# Altium PCB PCB1.PcbDoc
Units mm, origin at the board's own origin, x right, y up, seen from the top; angles counter-clockwise.
Board outline 122.72 x 80 mm, 2 copper layers (Top Layer, Bottom Layer); 41 components, 74 nets, 240 pads, 60 vias.
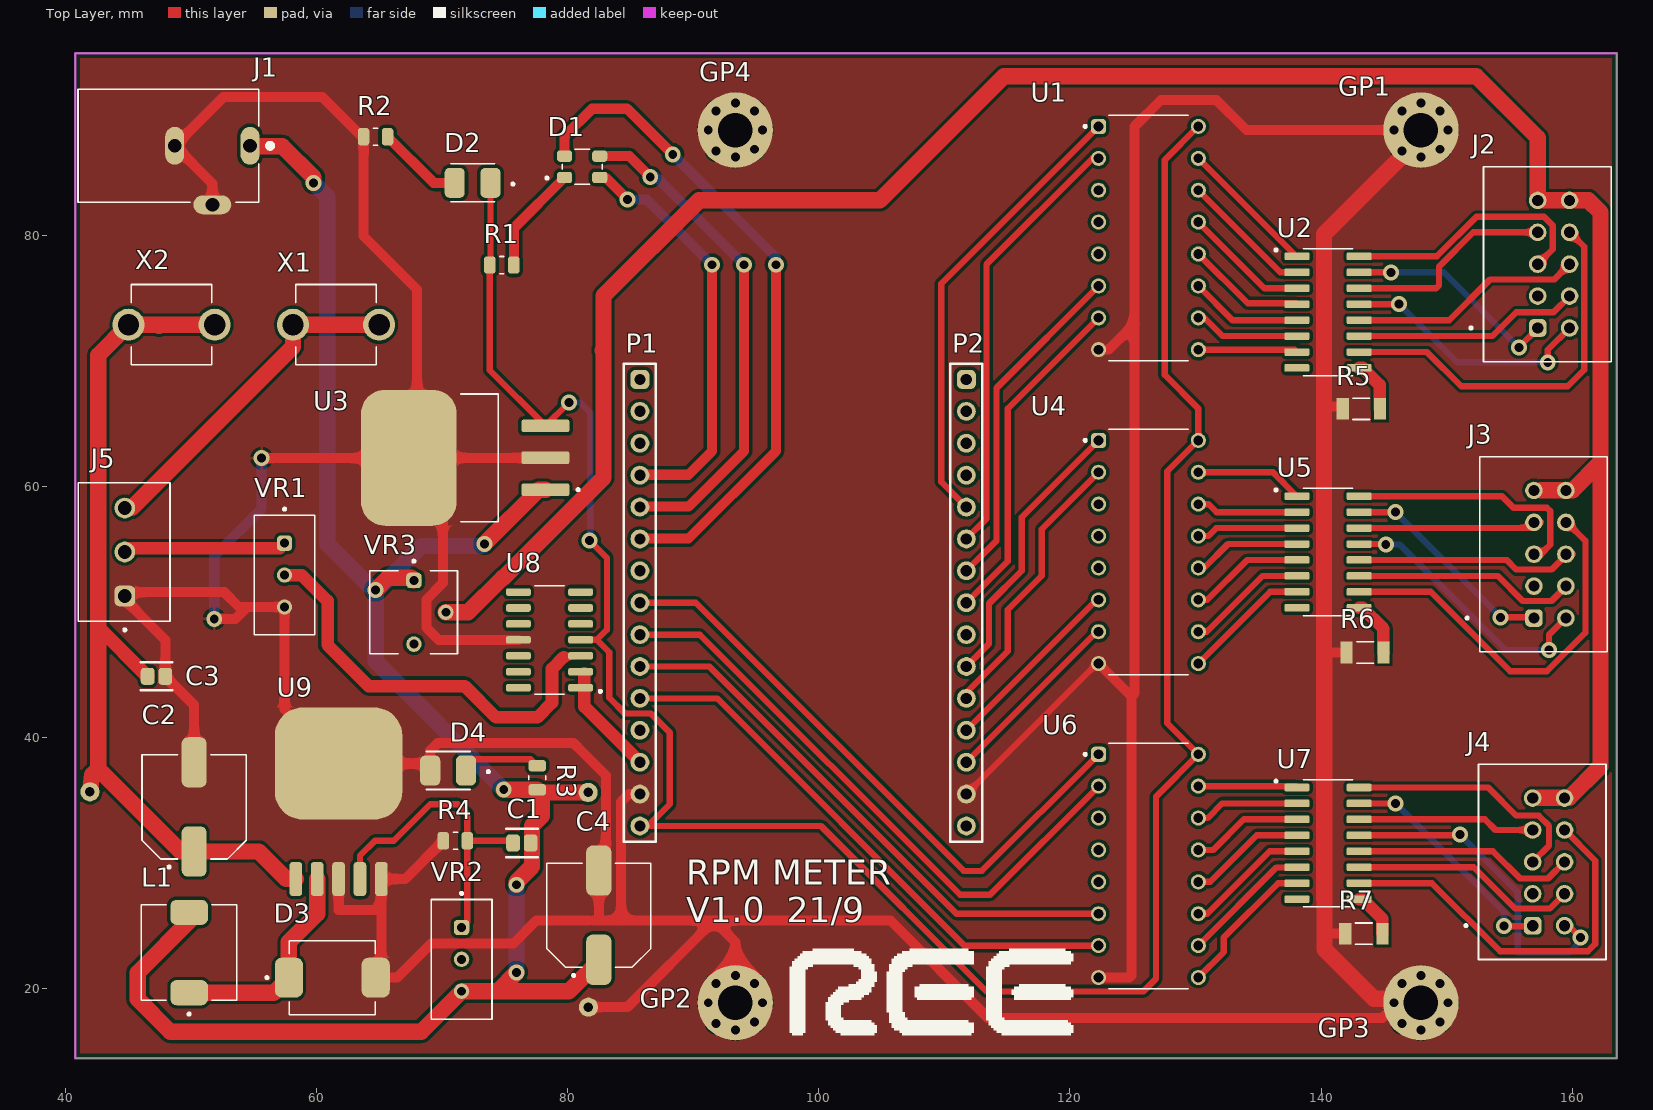
[diagram p0: Top Layer view]
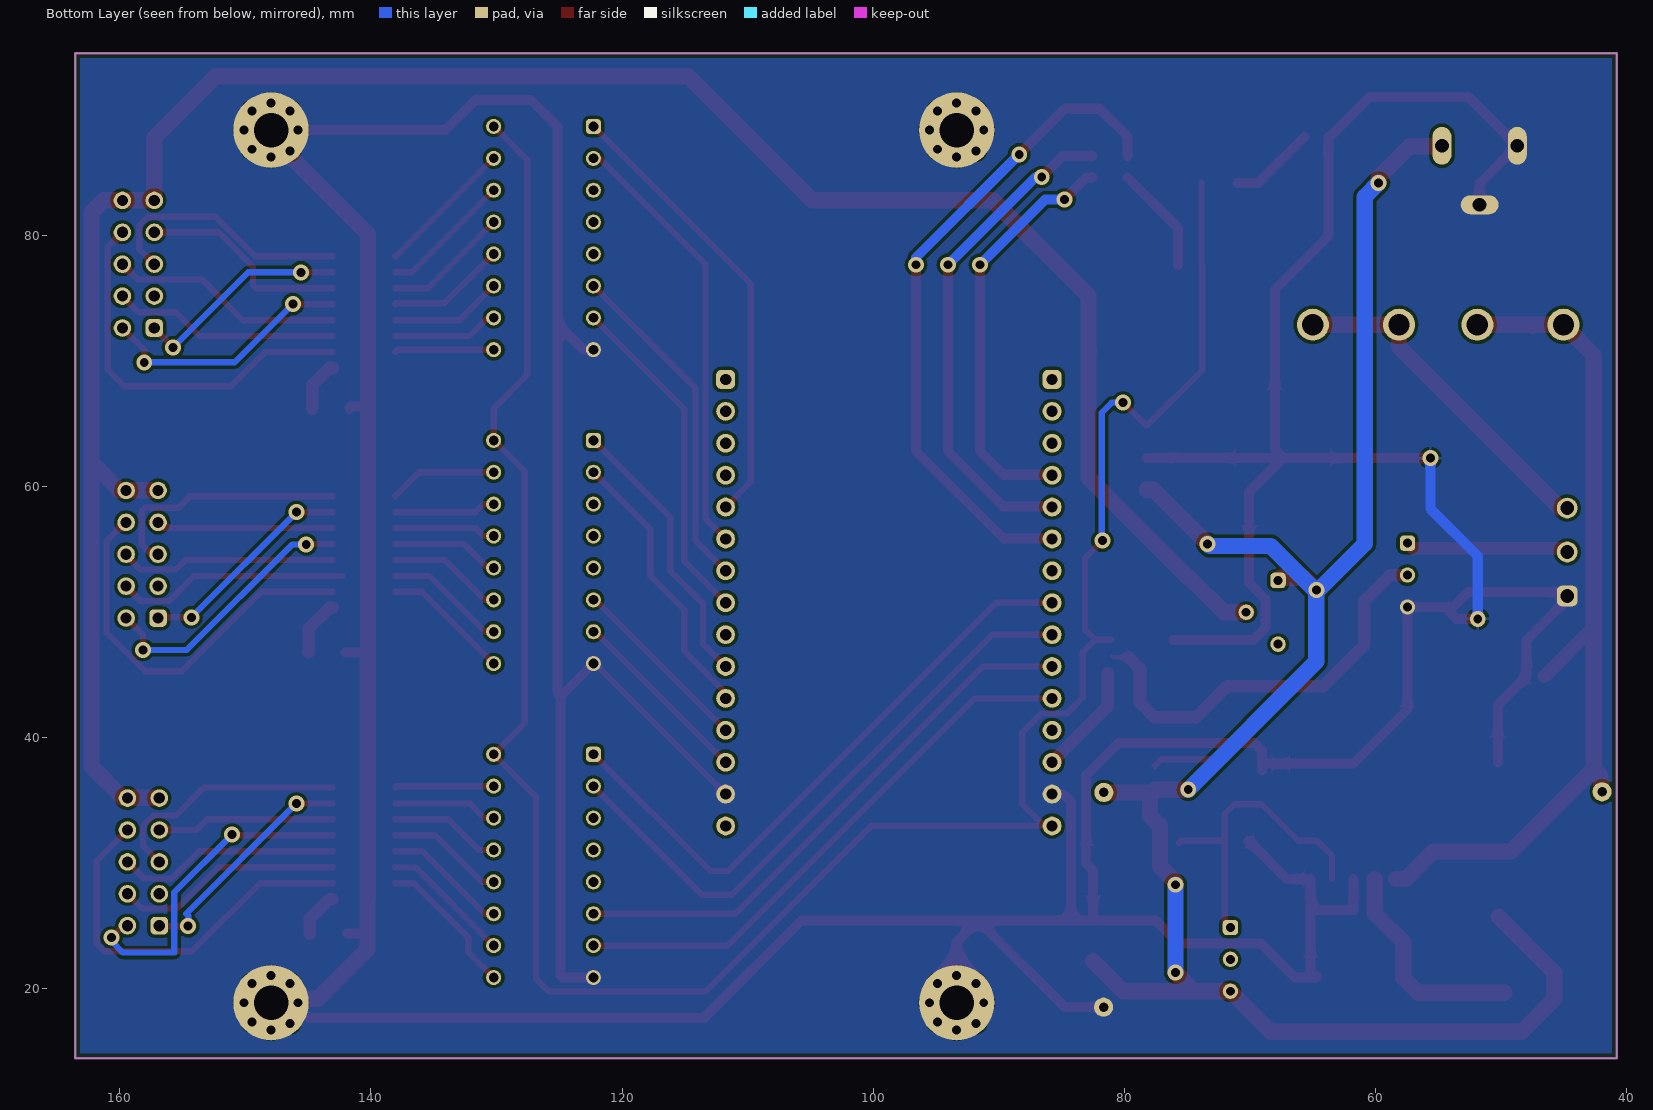
[diagram p1: Bottom Layer view, seen from below]

## Layer stack, top to bottom
Top Solder: solder mask 0.0102, Solder Resist, Dk 3.5
Top Layer: signal copper 0.0356
Dielectric 1: dielectric 0.32, FR-4, Dk 4.8
Bottom Layer: signal copper 0.0356
Bottom Solder: solder mask 0.0102, Solder Resist, Dk 3.5

## Board outline
40.8,14.5 108.25,14.5 163.525,14.5 163.525,94.5 108.35,94.5 40.8,94.5

## Design rules (kind name [scope] priority, off if disabled: settings)
Clearance "Schematic Clearance Constraint_3" [InNet('GND')] p1: gap=0.254 ignorepadtopadclearanceinfootprint=TRUE except(0: Arc-Hole Track-Hole SMDPad-Hole THPad-Hole Via-Hole Fill-Hole Poly-Hole Region-Hole Text-Hole)
Clearance "Schematic Clearance Constraint_2" [InNet('12v')] p2: gap=0.254 ignorepadtopadclearanceinfootprint=TRUE except(0: Arc-Hole Track-Hole SMDPad-Hole THPad-Hole Via-Hole Fill-Hole Poly-Hole Region-Hole Text-Hole)
Clearance "Schematic Clearance Constraint_1" [InNet('NetP1_13')] p3: gap=0.4 ignorepadtopadclearanceinfootprint=TRUE
Clearance "Schematic Clearance Constraint" [InNet('NetU8_3')] p4: gap=0.3 ignorepadtopadclearanceinfootprint=TRUE
Clearance "Main Clearance" [All] p5: gap=0.2 ignorepadtopadclearanceinfootprint=TRUE
PolygonConnect PolygonConnect_4 [All vs IsNamedPolygon('Top Layer-No Net')] p1: thpad.connectstyle=Direct thpad.reliefconductorwidth=0.254 thpad.reliefentries=4 thpad.polygonreliefangle="90 Angle" thpad.airgapwidth=0.254 smdpad.connectstyle=Direct smdpad.reliefconductorwidth=0.254 smdpad.reliefentries=4 smdpad.polygonreliefangle="90 Angle" smdpad.airgapwidth=0.254 via.connectstyle=Relief via.reliefconductorwidth=0.254 via.reliefentries=4 via.polygonreliefangle="90 Angle" via.airgapwidth=0.254
PolygonConnect PolygonConnect_3 [All vs IsNamedPolygon('Top Layer-No Net')] p2: thpad.connectstyle=Direct thpad.reliefconductorwidth=0.254 thpad.reliefentries=4 thpad.polygonreliefangle="90 Angle" thpad.airgapwidth=0.254 smdpad.connectstyle=Direct smdpad.reliefconductorwidth=0.254 smdpad.reliefentries=4 smdpad.polygonreliefangle="90 Angle" smdpad.airgapwidth=0.254 via.connectstyle=Relief via.reliefconductorwidth=0.254 via.reliefentries=4 via.polygonreliefangle="90 Angle" via.airgapwidth=0.254
PolygonConnect PolygonConnect_2 [All vs IsNamedPolygon('Top Layer-No Net')] p3: thpad.connectstyle=Direct thpad.reliefconductorwidth=0.254 thpad.reliefentries=4 thpad.polygonreliefangle="90 Angle" thpad.airgapwidth=0.254 smdpad.connectstyle=Direct smdpad.reliefconductorwidth=0.254 smdpad.reliefentries=4 smdpad.polygonreliefangle="90 Angle" smdpad.airgapwidth=0.254 via.connectstyle=Relief via.reliefconductorwidth=0.254 via.reliefentries=4 via.polygonreliefangle="90 Angle" via.airgapwidth=0.254
PolygonConnect PolygonConnect_1 [All vs IsNamedPolygon('Top Layer-No Net')] p4: thpad.connectstyle=Direct thpad.reliefconductorwidth=0.254 thpad.reliefentries=4 thpad.polygonreliefangle="90 Angle" thpad.airgapwidth=0.254 smdpad.connectstyle=Direct smdpad.reliefconductorwidth=0.254 smdpad.reliefentries=4 smdpad.polygonreliefangle="90 Angle" smdpad.airgapwidth=0.254 via.connectstyle=Relief via.reliefconductorwidth=0.254 via.reliefentries=4 via.polygonreliefangle="90 Angle" via.airgapwidth=0.254
PolygonConnect [All] p5: connectstyle=Relief reliefconductorwidth=0.254 reliefentries=4 polygonreliefangle="90 Angle" airgapwidth=0.254
RoutingVias [All] p1: holewidth=0.711 width=1.27 viastyle="Through Hole" minholewidth=0.3 minwidth=0.8 maxholewidth=0.711 maxwidth=1.27
SolderMaskExpansion [All] p1: expansion=0.102 istentingtop=FALSE
UnRoutedNet [All] p1: checkbadconnections=TRUE
Width "Schematic Width Constraint_7" [InNet('NetR5_1')] p1: maxlimit=1.5 minlimit=1 preferedwidth=1.3
Width "Schematic Width Constraint_6" [InNet('NetR7_1')] p2: maxlimit=1.5 minlimit=1 preferedwidth=1.3
Width "Schematic Width Constraint_5" [InNet('NetR6_1')] p3: maxlimit=1.5 minlimit=1 preferedwidth=1.3
Width "Schematic Width Constraint_13" [InNet('NetP1_13')] p4: maxlimit=1.5 minlimit=0.254 preferedwidth=1
Width "Schematic Width Constraint_12" [InNet('NetU8_3')] p5: maxlimit=1.5 minlimit=0.254 preferedwidth=1
Width "Schematic Width Constraint_4" [InNet('12v')] p6: maxlimit=1.5 minlimit=1 preferedwidth=1.3
Width "Schematic Width Constraint_3" [InNet('NetD3_C')] p7: maxlimit=1.5 minlimit=1 preferedwidth=1.3
Width "Schematic Width Constraint_2" [InNet('NetJ5_3')] p8: maxlimit=1.5 minlimit=1 preferedwidth=1.3
Width "Schematic Width Constraint_1" [InNet('NetJ2_5')] p9: maxlimit=1.5 minlimit=1 preferedwidth=1.3
Width "Schematic Width Constraint_11" [InNet('NetJ5_2')] p10: maxlimit=1.5 minlimit=0.254 preferedwidth=1
Width Width_1 [InNet('GND')] p11: maxlimit=2 minlimit=0.254 preferedwidth=0.8
Width "Schematic Width Constraint" [InNet('NetC2_1')] p12: maxlimit=1.5 minlimit=1 preferedwidth=1.3
Width [All] p13: maxlimit=2 minlimit=0.2 preferedwidth=0.5
29 further rules are at their usual default settings.

## Components (designator, comment, footprint, x,y, rotation, side; value= is the part's Value field where it differs from the comment)
C1 "C0805C104K5RAC" KEMET_C0805C-DN_IPC_C 76.351,31.625 r180 top
C2 "EEEFK1V221P" CAP_EEEFK1V221P 50.25,34.5 r90 top
C3 "C0805C104K5RAC" KEMET_C0805C-DN_IPC_C 47.25,44.9 r0 top
C4 "EEEFK1V221P" CAP_EEEFK1V221P 82.475,25.875 r90 top
D1 "LL-R3528RGBC-008-B" LED_LL-R3528RGBC-008-B 81.15,85.475 r0 top
D2 "OF-SMD3528WC" LED_OF-SMD3528WC 72.425,84.2 r180 top
D3 "SS34" DIOM7959X265N 61.25,20.9 r0 top
D4 "OF-SMD3528WC" LED_OF-SMD3528WC 70.475,37.4 r180 top
GP1 "Grounded Pad" "2.75mm Grounded Pad" 147.95,88.4 r0 top
GP2 "Grounded Pad" "2.75mm Grounded Pad" 93.35,18.9 r0 top
GP3 "Grounded Pad" "2.75mm Grounded Pad" 147.95,18.9 r0 top
GP4 "Grounded Pad" "2.75mm Grounded Pad" 93.35,88.4 r0 top
J1 "PJ-102A" CUI_PJ-102A 48.2,87.15 r180 top
J2 "102618-3" TE_102618-3 158.52,77.72 r90 top
J3 "102618-3" TE_102618-3 158.22,54.62 r90 top
J4 "102618-3" TE_102618-3 158.12,30.12 r90 top
J5 "1751251" PHOENIX_1751251 44.725,54.8 r90 top
L1 "B1047AS-471M=P3" IND_B1047AS-471M=P3 49.85,22.9 r90 top
P1 "Header 15" HDR1X15 85.75,68.54 r270 top
P2 "Header 15" HDR1X15 111.75,68.54 r270 top
R1 "RC0805JR-073K3L" RESC2012X60N 74.75,77.65 r0 top
R2 "RC0805JR-073K3L" RESC2012X60N 64.695,87.875 r0 top
R3 "RC0805JR-073K3L" RESC2012X60N 77.575,36.825 r270 top
R4 "RC0805JR-073K3L" RESC2012X60N 71.05,31.8 r0 top
R5 "RC1206JR-0713RL" RESC3116X65N 143.2,66.2 r180 top
R6 "RC1206JR-0713RL" RESC3116X65N 143.5,46.8 r180 top
R7 "RC1206JR-0713RL" RESC3116X65N 143.4,24.4 r180 top
U1 "CD4511BE" DIP794W45P254L1969H508Q16 126.25,79.8 r0 top
U2 "ULN2003AID" SOIC127P600X175-16N 140.55,73.9 r0 top
U3 "LM7805S/NOPB" TO254P1524X483-4N 71.83,62.3 r180 top
U4 "CD4511BE" DIP794W45P254L1969H508Q16 126.25,54.8 r0 top
U5 "ULN2003AID" SOIC127P600X175-16N 140.55,54.8 r0 top
U6 "CD4511BE" DIP794W45P254L1969H508Q16 126.25,29.8 r0 top
U7 "ULN2003AID" SOIC127P600X175-16N 140.55,31.6 r0 top
U8 "LM324DR" SOIC127P600X175-14N 78.55,47.8 r180 top
U9 "LM2596S-12" TO170P1435X465-6N 61.75,37.8 r0 top
VR1 "3296W-1-254LF" TRIM_3296W-1-254LF 57.45,52.96 r270 top
VR2 "3296W-1-254LF" TRIM_3296W-1-254LF 71.55,22.36 r270 top
VR3 "3362P-1-253LF" TRIM_3362P-1-253LF 67.75,50 r270 top
X1 "BK-6005" FUSE_BK-6005 61.55,72.9 r180 top
X2 "BK-6005" FUSE_BK-6005 48.45,72.9 r180 top

## Footprints (in the part's own frame and the unit in brackets; to place one, negate y for a bottom-side part, rotate by r counter-clockwise, add the part's x,y. Pads: shape width x height; smd on the part's side, far side on the other; paste and mask are expansions set on the pad)
"2.75mm Grounded Pad" [mm]
  round 6 hole 2.75: 1(0,0)
  body extent -3.1,-3.1 3.1,3.1, height 1.27
CAP_EEEFK1V221P [mm]
  rrect50% 4x2 smd: 1(-3.55,0) 2(3.55,0)
  silkscreen extent -4.9,-4.15 4.15,4.15, body extent -5.82,-4.42 5.83,4.43, height 1.27
CUI_PJ-102A [mm]
  oval 1.508x3.016 hole 1.1: 1(-6.5,0) 2(-0.5,0)
  oval 3.016x1.508 hole 1.1: 3(-3.5,4.7)
  silkscreen extent -8.3,-4.5 7.2,4.5, body extent -8.5,-4.77 7.53,5.83, height 1.27
DIOM7959X265N [mm]
  rrect50% 2.25x3.18 smd: A(3.455,0) C(-3.455,0)
  silkscreen extent -5.3,-2.95 3.44,2.95, body extent -5.4,-3.22 4.86,3.23, height 1.27
DIP794W45P254L1969H508Q16 [mm]
  rrect50% 1.2x1.2 hole 0.78: 1(-3.97,8.89)
  round 1.2 hole 0.78: 2(-3.97,6.35) 3(-3.97,3.81) 4(-3.97,1.27) 5(-3.97,-1.27) 6(-3.97,-3.81) 7(-3.97,-6.35) 8(-3.97,-8.89) 9(3.97,-8.89) 10(3.97,-6.35) 11(3.97,-3.81) 12(3.97,-1.27) 13(3.97,1.27) 14(3.97,3.81) 15(3.97,6.35) 16(3.97,8.89)
  silkscreen extent -5.13,-9.77 3.17,9.77, body extent -5.23,-10.12 4.81,10.12, height 1.27
FUSE_BK-6005 [mm]
  round 2.55 hole 1.7: 1(-3.43,0) 2(3.43,0)
  silkscreen extent -3.2,-3.2 3.2,3.2, body extent -4.98,-3.47 4.98,3.48, height 1.27
HDR1X15 [mm] "Connector; Header; 15 Position"
  rrect50% 1.5x1.5 hole 0.9: 1(0,0)
  round 1.5 hole 0.9: 2(2.54,0) 3(5.08,0) 4(7.62,0) 5(10.16,0) 6(12.7,0) 7(15.24,0) 8(17.78,0) 9(20.32,0) 10(22.86,0) 11(25.4,0) 12(27.94,0) 13(30.48,0) 14(33.02,0) 15(35.56,0)
  silkscreen extent -1.27,-1.27 36.83,1.27, body extent -1.37,-1.37 36.93,1.37, height 1.27
IND_B1047AS-471M=P3 [mm]
  rrect50% 2x3 smd: 1(-3.2,0) 2(3.2,0)
  silkscreen extent -5,-3.8 3.8,3.8, body extent -5.1,-4.07 4.48,4.08, height 1.27
KEMET_C0805C-DN_IPC_C [mm]
  rrect50% 1.105x1.356 smd paste+0 mask+0: 1(-0.701,0) 2(0.701,0)
  silkscreen extent -1.25,-1.12 1.25,1.12, body extent -1.45,-1.22 1.45,1.22, height 1.27
LED_LL-R3528RGBC-008-B [mm]
  rrect50% 1.2x0.9 smd: 1(-1.4,-0.85) 2(1.4,-0.85) 3(1.4,0.85) 4(-1.4,0.85)
  silkscreen extent -2.9,-1.4 1.6,1.4, body extent -3,-1.67 2.27,1.68, height 1.27
LED_OF-SMD3528WC [mm]
  rrect50% 1.6x2.4 smd: 1(-1.425,0) 2(1.425,0)
  silkscreen extent -3.3,-1.51 1.75,1.51, body extent -3.4,-1.67 2.5,1.68, height 1.27
PHOENIX_1751251 [mm]
  rrect50% 1.65x1.65 hole 1.1: 1(-3.5,0)
  round 1.65 hole 1.1: 2(0,0) 3(3.5,0)
  silkscreen extent -6.3,-3.6 5.5,3.7, body extent -6.4,-3.87 5.78,3.98, height 1.27
RESC2012X60N [mm]
  rrect50% 0.92x1.38 smd: 1(-0.955,0) 2(0.955,0)
  silkscreen extent -0.17,-0.68 0.17,0.68, body extent -1.69,-0.96 1.69,0.97, height 1.27
RESC3116X65N [mm]
  rect 0.97x1.73 smd: 1(-1.48,0) 2(1.48,0)
  silkscreen extent -0.67,-0.85 0.67,0.85
SOIC127P600X175-14N [mm]
  rrect50% 1.97x0.6 smd: 1(-2.475,3.81) 2(-2.475,2.54) 3(-2.475,1.27) 4(-2.475,0) 5(-2.475,-1.27) 6(-2.475,-2.54) 7(-2.475,-3.81) 8(2.475,-3.81) 9(2.475,-2.54) 10(2.475,-1.27) 11(2.475,0) 12(2.475,1.27) 13(2.475,2.54) 14(2.475,3.81)
  silkscreen extent -4.15,-4.33 1.17,4.33, body extent -4.25,-4.6 3.74,4.6, height 1.27
SOIC127P600X175-16N [mm]
  rrect25% 1.97x0.6 smd: 1(-2.475,4.445) 2(-2.475,3.175) 3(-2.475,1.905) 4(-2.475,0.635) 5(-2.475,-0.635) 6(-2.475,-1.905) 7(-2.475,-3.175) 8(-2.475,-4.445) 9(2.475,-4.445) 10(2.475,-3.175) 11(2.475,-1.905) 12(2.475,-0.635) 13(2.475,0.635) 14(2.475,1.905) 15(2.475,3.175) 16(2.475,4.445)
  silkscreen extent -4.24,-5.06 1.95,5.06, body extent -4.35,-5.22 3.74,5.23, height 1.27
TE_102618-3 [mm]
  rrect50% 1.398x1.398 hole 0.89: 1(-5.08,1.27)
  round 1.398 hole 0.89: 2(-2.54,1.27) 3(0,1.27) 4(2.54,1.27) 5(5.08,1.27) 6(-5.08,-1.27) 7(-2.54,-1.27) 8(0,-1.27) 9(2.54,-1.27) 10(5.08,-1.27)
  silkscreen extent -7.77,-4.57 7.77,6.69, body extent -8.05,-4.85 8.05,6.79, height 1.27
TO170P1435X465-6N [mil]
  rrect50% 40x106 smd: 1(-134,-356) 2(-67,-356) 3(0,-356) 4(67,-356) 5(134,-356)
  rrect50% 400x352 smd: 6(0,6)
  body extent -204,-413 204,186, height 50
TO254P1524X483-4N [mm]
  rrect25% 3.79x0.99 smd: 1(-6.4,2.54) 2(-6.4,0) 3(-6.4,-2.54)
  rrect50% 7.62x10.84 smd paste-6: 4(4.48,0)
  silkscreen extent -9.1,-5.08 0.35,5.08, body extent -9.2,-5.69 8.57,5.7, height 1.27
TRIM_3296W-1-254LF [mm]
  rrect50% 1.218x1.218 hole 0.71: 1(-2.54,0)
  round 1.218 hole 0.71: 2(0,0) 3(2.54,0)
  silkscreen extent -5.35,-2.41 4.76,2.42, body extent -5.45,-2.68 5.04,2.7, height 1.27
TRIM_3362P-1-253LF [mm]
  rrect50% 1.222x1.222 hole 0.714: 1(-2.54,0)
  round 1.222 hole 0.714: 2(0,2.54) 3(2.54,0)
  silkscreen extent -4.16,-3.53 3.3,3.47, body extent -4.26,-3.8 3.58,3.75, height 1.27

## Part data
C2 C4: "220ÂµF 35V Aluminum Electrolytic Capacitors Radial, Can - SMD 2000 Hrs @ 105Â°C", Package="RADIAL-2 Panasonic", Availability="In Stock", Check_prices=https://www.snapeda.com/parts/EEEFK1V221P/Panasonic/view-part/2501925/?ref=eda, MF=Panasonic, MP=EEEFK1V221P, Price=None, SnapEDA_Link=https://www.snapeda.com/parts/EEEFK1V221P/Panasonic/view-part/2501925/?ref=snap
D1: "LED; SMD; 3528, PLCC2; RGB; 3.5x2.8mm; 120Â°; Red lumin: 1", Package="PLCC-2 Lucky Light", Availability=Unavailable, MF="Lucky Light", MP=LL-R3528RGBC-008-B, Price=None, SnapEDA_Link=https://www.snapeda.com/parts/LL-R3528RGBC-008-B/Lucky%20Light/view-part/47649/?ref=snap
D2 D4: "LED; SMD; 3528, PLCC2; white cold; 1700-2500mcd; 120Â°; 2", Package="PLCC-2 Optoflash", Availability=Unavailable, Check_prices=https://www.snapeda.com/parts/OF-SMD3528WC/Optoflash/view-part/702333/?ref=eda, MF=Optoflash, MP=OF-SMD3528WC, Price=None, SnapEDA_Link=https://www.snapeda.com/parts/OF-SMD3528WC/Optoflash/view-part/702333/?ref=snap
D3: "Diode Schottky 40V 3A Surface Mount SMC _DO-214AB_", Package="DO-214AB-214 ON Semiconductor", Availability=Unavailable, MF="ON Semiconductor", MP=SS34, Price=None, SnapEDA_Link=https://www.snapeda.com/parts/SS34/ON%20Semiconductor/view-part/4631325/?ref=snap
GP1 GP2 GP3 GP4: library part "2.75mm Grounded Pad", "2.75mm Diameter Grounded Pad"
J1: "2.0 x 6.5 mm, 2.5 A, Horizontal, Through Hole, Tapered Pins, Dc Power Jack Connector", Package=None, Availability=Unavailable, CUI_purchase_URL=https://www.cuidevices.com/product/interconnect/connectors/dc-power-connectors/jacks/pj-102a?utm_source=snapeda.com&utm_medium=referral&utm_campaign=snapedaBOM, MF="CUI Devices", MP=PJ-102A, Price=None, SnapEDA_Link=https://www.snapeda.com/parts/PJ-102A/CUI%20Devices/view-part/55545/?ref=snap
J2 J3 J4: "10 MODII HDR DRST SHRD .100CL", Package=None, Availability=Unavailable, MP=102618-3, Price=None
J5: "3 Position Wire to Board Terminal Block Horizontal with Board 0.138 _3.50mm_ Through Hole", Package=None, Availability=Unavailable, MF="Phoenix Contact", MP=1751251, Price=None, SnapEDA_Link=https://www.snapeda.com/parts/1751251/Phoenix%20Contact/view-part/553210/?ref=snap
L1: "Inductor Power Shielded Wirewound 220uH 20% 100KHz Ferrite 470mA 1.1Ohm DCR 2929 T/R", Package=None, Availability=Unavailable, MP=B1047AS-471M=P3, Price=None
P1 P2: "Header, 15-Pin", LatestRevisionDate=17-Jul-2002, LatestRevisionNote="Re-released for DXP Platform.", Publisher="Altium Limited"
R1 R2 R3 R4: "RC Series 0805 0.125 W 3.3 kOhms 5% Â±100 ppm/Â°C SMT Thick Film Chip Resistor", Package=None, Availability=Unavailable, MP=RC0805JR-073K3L, Price=None
R5 R6 R7: "13 Ohms Â±5% 0.25W, 1/4W Chip Resistor 1206 _3216 Metric_ Moisture Resistant Thick Film", Package="3116 Yageo", Availability=Unavailable, MF=Yageo, MP=RC1206JR-0713RL, Price=None, SnapEDA_Link=https://www.snapeda.com/parts/RC1206JR-0713RL/Yageo/view-part/105893/?ref=snap
U1 U4 U6: "CMOS BCD-to-7-Segment LED Latch Decoder Drivers 16-PDIP -55 to 125", Package="PDIP-16 Texas Instruments", Availability=Good, Check_prices=https://www.snapeda.com/parts/CD4511BE/Texas%20Instruments/view-part/586644/?ref=eda, MF="Texas Instruments", MP=CD4511BE, Price=None, Purchase-URL=https://pricing.snapeda.com/search/part/CD4511BE/?ref=eda, SnapEDA_Link=https://www.snapeda.com/parts/CD4511BE/Texas%20Instruments/view-part/586644/?ref=snap
U2 U5 U7: "50-V, 7-ch darlington transistor array, -40 to 105C 16-SOIC -40 to 105", Package="SOIC-16 Texas Instruments", Check_prices=https://www.snapeda.com/parts/ULN2003AID/Texas%20Instruments/view-part/1101113/?ref=eda, Digi-Key_Part_Number=296-15407-2-ND, MF="Texas Instruments", MP=ULN2003AID, Purchase-URL=https://pricing.snapeda.com/search/part/ULN2003AID/?ref=eda, SnapEDA_Link=https://www.snapeda.com/parts/ULN2003AID/Texas%20Instruments/view-part/1101113/?ref=snap
U3: "1.5-A, 30-V, linear voltage regulator 3-DDPAK/TO-263 0 to 125", Package="TO-263-3 Texas Instruments", Availability=Warning, DigiKey-Purchase-URL=https://snapeda.com/shop?store=DigiKey&id=546227, MF="Texas Instruments", MP=LM7805S/NOPB, Price=None, SnapEDA_Link=https://www.snapeda.com/parts/LM7805S/NOPB/Texas%20Instruments/view-part/546227/?ref=snap, Texas_Instruments-Purchase-URL=https://snapeda.com/shop?store=Texas+Instruments&id=546227
U8: "4-Channel industry standard operational amplifier 14-SOIC 0 to 70", Package="SOIC-14 Texas Instruments", Arrow_Electronics-Purchase-URL=https://snapeda.com/shop?store=Arrow+Electronics&id=1818, Availability=Good, DigiKey-Purchase-URL=https://snapeda.com/shop?store=DigiKey&id=1818, MF="Texas Instruments", Mouser-Purchase-URL=https://snapeda.com/shop?store=Mouser&id=1818, MP=LM324DR, Price=None, SnapEDA_Link=https://www.snapeda.com/parts/LM324DR/Texas%20Instruments/view-part/1818/?ref=snap, Texas_Instruments-Purchase-URL=https://snapeda.com/shop?store=Texas+Instruments&id=1818
U9: "Buck Switching Regulator IC Positive Fixed 12V 1 Output 3A TO-263-6, DÂ²Pak _5 Leads + Tab_, TO-263BA", Package="TO-263-5 Texas Instruments", Availability=Unavailable, MF="Texas Instruments", MP=LM2596S-12, Price=None, SnapEDA_Link=https://www.snapeda.com/parts/LM2596S-12/Texas%20Instruments/view-part/558935/?ref=snap
VR1 VR2: "250 kOhms 0.5W, 1/2W PC Pins Through Hole Trimmer Potentiometer Cermet 25 Turn Top Adjustment", Package="SOT-23-5 Bourns", Availability=Warning, Check_prices=https://www.snapeda.com/parts/3296W-1-254LF/Bourns%20-%20J.W.%20Miller/view-part/231802/?ref=eda, MF=Bourns, MP=3296W-1-254LF, Price=None, Purchase-URL=https://pricing.snapeda.com/search/part/3296W-1-254LF/?ref=eda, SnapEDA_Link=https://www.snapeda.com/parts/3296W-1-254LF/Bourns%20-%20J.W.%20Miller/view-part/231802/?ref=snap
VR3: "25 kOhms 0.5W, 1/2W PC Pins Through Hole Trimmer Potentiometer Cermet 1 Turn Top Adjustment", Package="3116 Bourns", Availability=Good, Check_prices=https://www.snapeda.com/parts/3362P-1-253LF/Bourns/view-part/493663/?ref=eda, MF=Bourns, MP=3362P-1-253LF, Price=None, Purchase-URL=https://pricing.snapeda.com/search/part/3362P-1-253LF/?ref=eda, SnapEDA_Link=https://www.snapeda.com/parts/3362P-1-253LF/Bourns/view-part/493663/?ref=snap
X1 X2: "Fuse Clip 1 Circuit Cartridge Through Hole", Package="Non-Standard MPD", Availability=Unavailable, MF=MPD, MP=BK-6005, Price=None, SnapEDA_Link=https://www.snapeda.com/parts/BK-6005/MPD/view-part/4614389/?ref=snap

## Free pads (board coordinates)
  round 1.524 hole 0.762: 7(81.65,18.55) 8(81.625,35.65) 9(41.95,35.7)

## Via types
v1: diameter 1.27, hole 0.711, Top Layer to Bottom Layer, 60 vias

## Nets (pads, with @x,y where several pads share a name; then routed paths per layer and width w, separated by ;. In a path a pad name is that pad's centre, name@x,y a point inside that pad or via, vN(x,y) a via of type N, cw(c..) or ccw(c..) an arc to the next point about the centre after c; other vN are vias at no path point)
12v: C1.1 C4.1 J1.1 L1.2 pad.8 R3.2 U3.1 VR2.3 VR3.1 | length 154.4
  Top Layer w1.3: L1.2@50.2,25.75 45.75,21.3 45.75,19.2 48.35,16.6 68.33,16.6 VR2.3 74.43,19.82 ; J1.1 54.725,87.125 57.275,87.125 59.75,84.65 v1(59.75,84.2) ; v1(64.7,51.775) 65.675,52.75 67.54,52.75 VR3.1 ; v1(73.375,55.45) 77.685,59.76 U3.1 ; v1(74.905,35.87) R3.2 R3.2@77.795,35.65 ; v1(75.925,21.315) 74.43,19.82 ; v1(75.925,28.3) 75.925,28.525 77.152,29.752 77.152,33.002 77.95,33.8 77.95,35.495 R3.2@77.795,35.65 ; pad.8 R3.2@77.795,35.65 ; C4.1@82.475,22.2 80.095,19.82 74.43,19.82
  Bottom Layer w1.3: v1(59.75,84.2) 60.85,83.1 60.85,55.45 64.675,51.625 v1@64.7,51.65 ; v1(64.7,51.775) v1@64.7,51.65 ; v1(73.375,55.45) 73.2,55.275 68.325,55.275 v1@64.7,51.65 ; v1(74.905,35.87) 64.7,46.075 v1@64.7,51.65 ; v1(75.925,21.315) v1(75.925,28.3)
GND: C2.2 C3.2 C4.2 D3.A D4.2 GP1.1 GP2.1 GP3.1 GP4.1 J1.2 J1.3 J5.1 P1.14 P2.14 pad.7 R2.1 R4.1 R5.2 R6.2 R7.2 U1.8 U3.2 U3.4 U4.8 U6.8 U8.11 U9.3 U9.5 U9.6 VR1.3 | length 534.6
  Top Layer w0.5: P2.14 122.14,45.91 U4.8
  Top Layer w0.8: C2.2 50.25,42.601 C3.2 47.951,47.799 44.725,51.025 J5.1 44.725,51.6 52.65,51.6 53.83,50.42 54.495,50.42 ; J1.3 51.7,84.15 J1.2 52.575,91.025 60.47,91.025 R2.1@63.72,87.775 ; v1(51.85,49.475) 53.55,49.475 54.495,50.42 ; v1(55.625,62.275) 67.325,62.275 U3.4 ; U9.3 61.75,26.3 64.65,26.3 65.154,26.804 ; R2.1 63.74,79.96 68,75.7 68,62.95 U3.4 ; D4.2 D4.2@69.05,38.275 ; R4.1 67.053,28.758 U9.5 65.154,26.804 ; U8.11 69.725,47.8 68.75,48.775 68.75,51.025 70.05,52.325 70.05,59.6 U3.4 ; U3.2 U3.4 ; pad.7 84.75,18.55 91.65,25.45 ; 81.7,25.45 77.5,25.45 75.675,23.625 69.125,23.625 66.4,20.9 D3.A 64.705,21.029 64.834,21.029 65.154,21.349 65.154,26.804 ; 82.05,25.45 82.6,25.45 ; P1.14 84.87,35.52 84.25,34.9 84.25,25.45 ; GP2.1 v1(93.35,21.059) 93.35,23.75 91.65,25.45 ; U6.8 124.74,20.91 124.89,21.06 124.89,43.3 ; U4.8 124.89,43.3 ; U1.8 123.06,70.91 125.15,73 ; 140.225,66.4 141.635,66.4 141.72,66.315 R5.2 ; 140.275,24.6 140.475,24.4 R7.2 ; 140.345,46.8 R6.2 ; GP3.1@145.548,19.231 145.791,18.988 v1(145.791,18.9) GP3.1 GP3.1@146.15,17.1 ; GP1.1@145.791,88.7 GP1.1@146.35,88.7 ; v1(146.426,17.249) 145.77,17.905 145.086,17.905 144.881,17.7 113.45,17.7 105.7,25.45 91.65,25.45 ; GP1.1@146.515,86.406 146.515,87.676 v1(145.791,88.4) 134.05,88.4 131.65,90.8 127.25,90.8 125.15,88.7 125.15,73 ; GP3.1@147.95,19.5 GP3.1@148.95,19.5 ; 54.495,50.42 VR1.3 57.45,42.252 U9.6 68.727,37.952 D4.2@69.05,38.275 ; D4.2@69.05,38.275 69.05,38.975 69.65,39.575 80.475,39.575 81.175,38.875 83.041,37.009 83.041,29.991 C4.2 82.475,25.575 82.6,25.45 ; 82.6,25.45 84.25,25.45 ; 84.25,25.45 91.65,25.45 ; 124.89,43.3 125.15,43.56 125.15,73
  Top Layer w1.3: 140.345,46.8 140.245,46.9 ; GP3.1@145.548,19.231 144.219,19.231 140.275,23.175 140.275,24.6 140.275,27.145 140.245,27.175 140.245,46.9 ; GP1.1@146.515,86.406 140.225,80.116 140.225,66.4 140.225,46.92 140.245,46.9
  Bottom Layer w0.8: v1(51.85,49.475) 51.85,54.475 55.625,58.25 v1(55.625,62.275)
  other v1: 93.35,16.741 147.95,16.741 91.826,17.249 94.874,17.376 149.474,17.376 91.191,18.9 95.509,18.9 150.109,18.9 91.826,20.424 94.874,20.424 146.426,20.424 149.474,20.424 147.95,21.059 93.35,86.241 147.95,86.241 91.826,86.749 146.426,86.749 94.874,86.876 149.474,86.876 91.191,88.4 95.509,88.4 150.109,88.4 91.826,89.924 94.874,89.924 146.426,89.924 149.474,89.924 93.35,90.559 147.95,90.559
NetC1_2: C1.2 R4.2 U9.4 VR2.1 | length 25.4
  Top Layer w0.5: U9.4 63.452,30.602 64.65,31.8 66.15,31.8 69.05,34.7 71.25,34.7 72.005,33.945 R4.2 ; VR2.1 72.005,25.355 R4.2 ; C1.2 75.475,31.8 R4.2
NetC2_1: C2.1 C3.1 pad.9 U9.1 X2.1 X2.2 | length 70.3
  Top Layer w1.1: 42.6,48.848 C3.1
  Top Layer w1.3: pad.9 42.125,37.05 42.6,37.525 ; 42.6,48.825 42.6,37.525 ; 42.6,48.848 42.6,70.48 X2.2 47.525,72.9 ; 47.45,72.825 47.525,72.9 ; X2.1 47.525,72.9 ; U9.1 57.592,28.758 55.4,30.95 C2.1 49.175,30.95 42.6,37.525
NetD1_1: D1.1 R1.2 | length 8.7
  Top Layer w0.8: R1.2 75.705,80.58 D1.1
NetD1_2: D1.2 P1.4 | length 33.2
  Top Layer w0.8: D1.2 83.025,84.625 v1(84.775,82.875) ; P1.4 85.78,60.95 89.625,60.95 91.5,62.825 v1(91.5,77.675)
  Bottom Layer w0.8: v1(84.775,82.875) 86.3,82.875 v1(91.5,77.675)
NetD1_3: D1.3 P1.5 | length 40.1
  Top Layer w0.8: D1.3 84.917,86.325 v1(86.571,84.671) ; P1.5 85.78,58.41 89.625,58.41 94.04,62.825 v1(94.04,77.675)
  Bottom Layer w0.8: v1(86.571,84.671) 87.044,84.671 v1(94.04,77.675)
NetD1_4: D1.4 P1.6 | length 53.4
  Top Layer w0.8: D1.4 79.75,87.9 81.95,90.1 84.734,90.1 v1(88.367,86.467) ; P1.6 85.78,55.87 89.625,55.87 96.58,62.825 v1(96.58,77.675)
  Bottom Layer w0.8: v1(88.367,86.467) 96.58,78.254 v1(96.58,77.675)
NetD2_1: D2.1 P1.15 R1.1 U1.16 U3.3 U4.16 U6.16 U8.4 | length 186.2
  Top Layer w0.5: D2.1 73.85,77.705 R1.1 73.795,69.275 U3.3 80.09,66.7 v1(80.1,66.7) ; U8.4 82.325,47.8 ; v1(81.75,55.7) 83.125,54.325 83.125,48.6 82.325,47.8 ; P1.15 P1.15@86.38,32.98 ; U1.16 127.55,86.02 127.55,68.9 130.22,66.23 U4.16 127.75,61.22 127.75,41.16 U6.16 126.85,35.32 126.85,20.8 125.854,19.804 113.346,19.804 100.17,32.98 P1.15@86.38,32.98 ; 82.325,47.8 83.3,46.825 83.3,43.2 84.56,41.94 86.61,41.94 88.125,40.425 88.125,34.725 P1.15@86.38,32.98
  Bottom Layer w0.5: v1@79.875,66.85 80.025,66.7 v1(80.1,66.7) 81,66.7 81.8,65.9 81.8,55.75 v1(81.75,55.7)
NetD2_2: D2.2 R2.2 | length 6.9
  Top Layer w0.8: R2.2 69.325,84.2 D2.2
NetD3_C: D3.C L1.1 U9.2 | length 17.3
  Top Layer w1.3: L1.1@49.75,19.7 L1.1 56.595,19.7 D3.C 57.795,23.745 60.048,25.998 U9.2
NetD4_1: D4.1 R3.1 | length 5.9
  Top Layer w0.5: D4.1@71.925,38.3 77.055,38.3 R3.1
NetJ2_1: J2.1 U2.15 | length 17.4
  Top Layer w0.5: U2.15 v1(145.575,77.075) ; v1(155.75,71.1) 157.25,72.6 J2.1
  Bottom Layer w0.5: v1(145.575,77.075) 149.775,77.075 v1(155.75,71.1)
NetJ2_3: J2.3 U2.16 | length 20.6
  Top Layer w0.5: U2.16 149.221,78.345 152.376,81.5 157.75,81.5 158.45,80.8 158.45,78.92 J2.3
NetJ2_4: J2.4 U2.14 | length 16.9
  Top Layer w0.5: U2.14 149.155,75.805 149.39,76.04 149.39,77.524 152.126,80.26 J2.4
NetJ2_5: J2.5 J2.10 J3.5 J3.10 J4.5 J4.10 VR3.2 | length 181.5
  Top Layer w1.3: VR3.2 72.066,50 74.826,52.76 74.89,52.76 82.85,60.72 82.85,70.925 ; 82.775,70.85 82.85,70.925 ; J4.5@157.21,35.22 159.75,35.22 162.25,37.72 162.25,61.92 ; J3.5@157.51,59.72 160.05,59.72 162.25,61.92 ; 82.85,70.925 82.85,75.2 90.45,82.8 104.85,82.8 114.75,92.7 152.35,92.7 157.25,87.8 J2.5 J2.10 161.3,82.8 162.25,81.85 162.25,61.92
NetJ2_6: J2.6 U2.13 | length 20.4
  Top Layer w0.5: U2.13 v1(146.215,74.535) ; v1(158.05,69.9) 158.05,70.9 J2.6
  Bottom Layer w0.5: v1(146.215,74.535) 150.85,69.9 v1(158.05,69.9)
NetJ2_7: J2.7 U2.11 | length 18.1
  Top Layer w0.5: U2.11 153.645,71.995 155.55,73.9 158.51,73.9 J2.7
NetJ2_8: J2.8 U2.12 | length 18.6
  Top Layer w0.5: U2.12 150.215,73.265 153.45,76.5 158.57,76.5 J2.8
NetJ2_9: J2.9 U2.10 | length 31
  Top Layer w0.5: U2.10 148.425,70.725 151.15,68 159.65,68 160.95,69.3 160.95,79.1 J2.9
NetJ3_1: J3.1 U5.15 | length 17.4
  Top Layer w0.5: U5.15 v1(145.925,57.975) ; v1(154.3,49.6) 156.89,49.6 J3.1
  Bottom Layer w0.5: v1(145.925,57.975) v1(154.3,49.6)
NetJ3_3: J3.3 U5.16 | length 19.4
  Top Layer w0.5: U5.16 154.405,59.245 155.321,58.329 157.986,58.329 158.25,58.065 158.25,55.38 J3.3@157.51,54.64
NetJ3_4: J3.4 U5.14 | length 14.7
  Top Layer w0.5: U5.14 157.035,56.705 J3.4@157.51,57.18
NetJ3_6: J3.6 U5.13 | length 21.7
  Top Layer w0.5: U5.13 145.115,55.435 v1(145.15,55.4) ; v1(158.15,47) 158.15,48.2 J3.6
  Bottom Layer w0.5: v1(145.15,55.4) 146.25,55.4 154.65,47 v1(158.15,47)
NetJ3_7: J3.7 U5.11 | length 18.8
  Top Layer w0.5: U5.11@142.325,52.895 U5.11 154.055,52.895 156.05,50.9 158.35,50.9 J3.7@159.7,52.25
NetJ3_8: J3.8 U5.12 | length 17.9
  Top Layer w0.5: U5.12 154.785,54.165 155.55,53.4 158.35,53.4 159.59,54.64 J3.8@160.05,54.64
NetJ3_9: J3.9 U5.10 | length 31.4
  Top Layer w0.5: U5.10 148.725,51.625 155.05,45.3 157.984,45.3 161.05,48.366 161.05,55.7 159.59,57.16 J3.9
NetJ4_1: J4.1 U7.15 | length 18.7
  Top Layer w0.5: U7.15 v1(145.925,34.775) ; v1(154.55,25) 156.81,25 J4.1
  Bottom Layer w0.5: v1(145.925,34.775) 154.71,25.99 154.55,25.83 v1(154.55,25)
NetJ4_3: J4.3 U7.16 | length 19.8
  Top Layer w0.5: U7.16 153.305,36.045 155.541,33.809 157.326,33.809 158.15,32.985 158.15,31.42 J4.3
NetJ4_4: J4.4 U7.14 | length 14.2
  Top Layer w0.5: U7.14 153.045,33.505 153.89,32.66 J4.4
NetJ4_6: J4.6 U7.13 | length 27
  Top Layer w0.5: U7.13 150.985,32.235 v1(151.05,32.3) ; J4.6 159.71,25.04 v1(160.65,24.1) v1@160.33,24.1
  Bottom Layer w0.5: v1(151.05,32.3) 155.65,27.7 155.65,22.9 159.75,22.9 160.65,23.8 v1(160.65,24.1)
NetJ4_7: J4.7 U7.11 | length 18.2
  Top Layer w0.5: U7.11 152.155,29.695 155.45,26.4 158.21,26.4 J4.7
NetJ4_8: J4.8 U7.12 | length 17.8
  Top Layer w0.5: U7.12 153.685,30.965 155.85,28.8 158.07,28.8 J4.8
NetJ4_9: J4.9 U7.10 | length 31.4
  Top Layer w0.5: U7.10 148.825,28.425 154.25,23 161.25,23 161.835,23.585 161.835,30.215 J4.9
NetJ5_2: J5.2 VR1.1 | length 13
  Top Layer w1: J5.2 45.025,55.1 57.05,55.1 VR1.1
NetJ5_3: J5.3 X1.1 X1.2 | length 27.3
  Top Layer w1.3: J5.3 45.275,58.3 46.512,59.538 58.12,71.145 X1.2 X1.1
NetP1_8: P1.8 U6.1 | length 49.2
  Top Layer w0.5: P1.8 90.19,50.76 111.55,29.4 112.99,29.4 U6.1
NetP1_9: P1.9 U6.2 | length 48.7
  Top Layer w0.5: P1.9 90.53,48.22 111.25,27.5 113.63,27.5 U6.2
NetP1_10: P1.10 U6.6 | length 44.7
  Top Layer w0.5: P1.10 91.27,45.68 110.96,25.99 U6.6
NetP1_11: P1.11 U6.7 | length 44.7
  Top Layer w0.5: P1.11 91.91,43.14 111.6,23.45 U6.7
NetP1_13: P1.13 U8.1 U8.2 | length 8.9
  Top Layer w1: U8.2@81.325,45.16 81.325,42.485 P1.13
NetP2_5: P2.5 U1.1 | length 36.3
  Top Layer w0.5: P2.5 109.75,60.38 109.75,76.16 U1.1
NetP2_6: P2.6 U1.2 | length 35
  Top Layer w0.5: P2.6 113.35,57.44 113.35,77.7 121.8,86.15 U1.2
NetP2_7: P2.7 U1.6 | length 27.1
  Top Layer w0.5: P2.7 114.15,55.7 114.15,67.86 U1.6
NetP2_8: P2.8 U1.7 | length 27.1
  Top Layer w0.5: P2.8 115.05,54.06 115.05,66.22 U1.7
NetP2_10: P2.10 U4.1 | length 22.4
  Top Layer w0.5: P2.10 113.55,47.48 113.55,50.7 116.15,53.3 116.15,57.56 U4.1
NetP2_11: P2.11 U4.2 | length 22.4
  Top Layer w0.5: P2.11 111.75,43.6 115.05,46.9 115.05,50.2 117.75,52.9 117.75,56.62 U4.2
NetP2_12: P2.12 U4.6 | length 14.8
  Top Layer w0.5: P2.12 122.14,50.99 U4.6
NetP2_13: P2.13 U4.7 | length 14.8
  Top Layer w0.5: P2.13 122.14,48.45 U4.7
NetR5_1: R5.1 U2.9 | length 4.1
  Top Layer w1: U2.9 143.31,69.455 144.665,68.1 144.665,66.215 R5.1
NetR6_1: R6.1 U5.9 | length 4.5
  Top Layer w1: U5.9 143.31,50.355 144.965,48.7 144.965,46.815 R6.1
NetR7_1: R7.1 U7.9 | length 3.7
  Top Layer w1: U7.9 143.31,27.155 144.865,25.6 144.865,24.415 R7.1
NetU1_9: U1.9 U2.7 | length 7.9
  Top Layer w0.5: U1.9 137.89,70.91 U2.7
NetU1_10: U1.10 U2.6 | length 8.5
  Top Layer w0.5: U1.10 130.7,73.45 132.155,71.995 U2.6
NetU1_11: U1.11 U2.5 | length 9
  Top Layer w0.5: U1.11 132.945,73.265 U2.5
NetU1_12: U1.12 U2.4 | length 9.5
  Top Layer w0.5: U1.12 134.15,74.6 138.01,74.6 U2.4
NetU1_13: U1.13 U2.3 | length 10
  Top Layer w0.5: U1.13 135.485,75.805 U2.3
NetU1_14: U1.14 U2.2 | length 10.6
  Top Layer w0.5: U1.14 136.755,77.075 U2.2
NetU1_15: U1.15 U2.1 | length 11.1
  Top Layer w0.5: U1.15 138.025,78.345 U2.1
NetU4_9: U4.9 U5.7 | length 10.2
  Top Layer w0.5: U4.9 135.935,51.625 U5.7
NetU4_10: U4.10 U5.6 | length 9.7
  Top Layer w0.5: U4.10 130.9,48.45 135.345,52.895 U5.6
NetU4_11: U4.11 U5.5 | length 9.2
  Top Layer w0.5: U4.11 130.94,50.99 134.115,54.165 U5.5
NetU4_12: U4.12 U5.4 | length 8.6
  Top Layer w0.5: U4.12 130.68,53.53 132.585,55.435 U5.4
NetU4_13: U4.13 U5.3 | length 8.1
  Top Layer w0.5: U4.13 131.02,56.07 131.655,56.705 U5.3
NetU4_14: U4.14 U5.2 | length 8.1
  Top Layer w0.5: U4.14 131.04,58.61 131.675,57.975 U5.2
NetU4_15: U4.15 U5.1 | length 8.6
  Top Layer w0.5: U4.15 136.17,61.15 U5.1
NetU6_9: U6.9 U7.7 | length 11.6
  Top Layer w0.5: U6.9 132.25,22.94 132.25,24.1 136.575,28.425 U7.7
NetU6_10: U6.10 U7.6 | length 10.4
  Top Layer w0.5: U6.10 136.45,29.68 138.06,29.68 U7.6
NetU6_11: U6.11 U7.5 | length 9.9
  Top Layer w0.5: U6.11 130.94,25.99 135.915,30.965 U7.5
NetU6_12: U6.12 U7.4 | length 9.4
  Top Layer w0.5: U6.12 131.18,28.53 134.885,32.235 U7.4
NetU6_13: U6.13 U7.3 | length 8.9
  Top Layer w0.5: U6.13 131.42,31.07 133.855,33.505 U7.3
NetU6_14: U6.14 U7.2 | length 8.3
  Top Layer w0.5: U6.14 130.96,33.61 132.125,34.775 U7.2
NetU6_15: U6.15 U7.1 | length 7.9
  Top Layer w0.5: U6.15 137.97,36.15 U7.1
NetU8_3: U8.3 VR1.2 | length 33.9
  Top Layer w0.254: 79.675,46.425 80.92,46.425 U8.3
  Top Layer w1: VR1.2 58.815,52.96 60.875,50.9 60.875,47.4 64.15,44.125 71.8,44.125 74.3,41.625 77.575,41.625 78.75,42.8 78.75,45.5 79.675,46.425
pads on no net: J2.2 J3.2 J4.2 P1.1 P1.2 P1.3 P1.7 P1.12 P2.1 P2.2 P2.3 P2.4 P2.9 P2.15 U1.3 U1.4 U1.5 U2.8 U4.3 U4.4 U4.5 U5.8 U6.3 U6.4 U6.5 U7.8 U8.5 U8.6 U8.7 U8.8 U8.9 U8.10 U8.12 U8.13 U8.14 VR2.2 VR3.3

## Polygon pours and split planes (outlines as drawn)
GND on Bottom Layer "Top Layer-No Net" (solid, remove dead copper, pour order 10): 40.8,14.5 40.8,94.5 163.525,94.5 163.525,14.5
GND on Top Layer "Top Layer-No Net" (solid, remove dead copper, pour order 8): 40.8,14.5 40.8,94.5 163.325,94.5 163.525,94.3 163.525,14.7 41,14.7

## Keep-outs
Keep-Out Layer:
  the board outline again, w0.2

## Silkscreen, mask and mechanical layers (free items; w line width, h text height)
Top Overlay:
  drawing of 5 lines, arcs and shapes, not listed
  text "RPM METER / V1.0  21/9" at 89.45,25.3 h2